# Altium PCB Main.PcbDoc (part 4 of 4)
Units mm, origin at the board's own origin, x right, y up, seen from the top; angles counter-clockwise.
Board outline 282.3 x 31.89 mm, 2 copper layers (Top Layer, Bottom Layer); 208 components, 197 nets, 886 pads, 366 vias.
Unrouted connection lines stored in the file: 118.
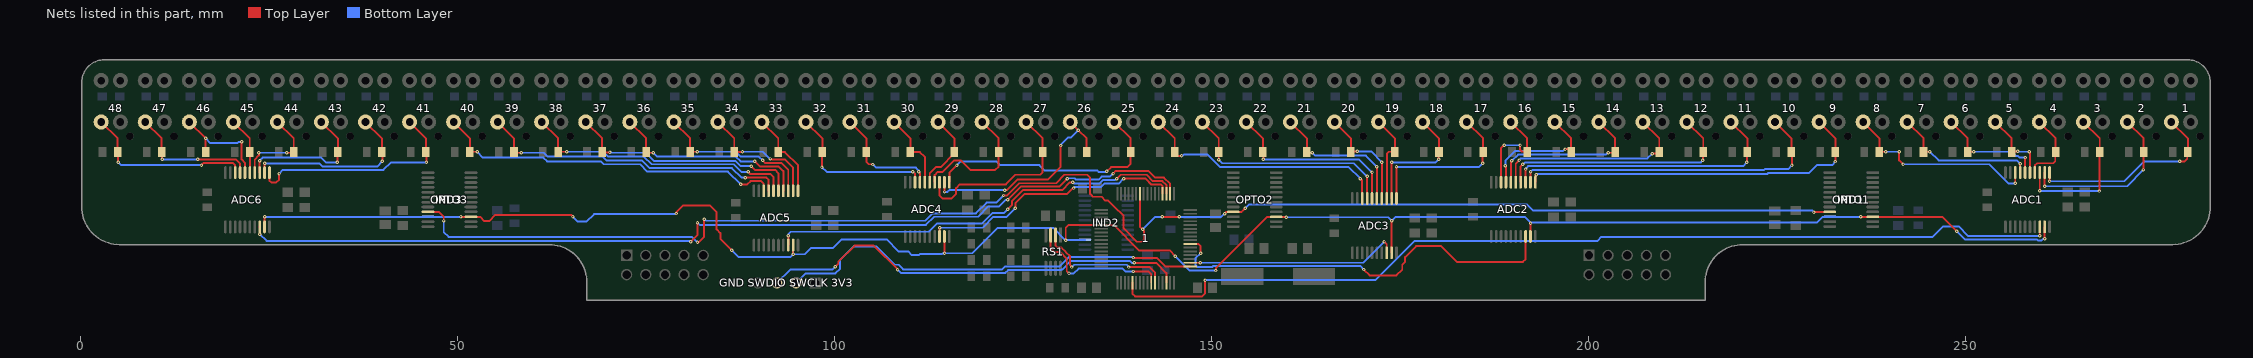
[diagram p4: the nets of this part, all layers, seen from the top]

## Via types
v1: diameter 0.45, hole 0.2, Top Layer to Bottom Layer, 362 vias
v2: diameter 5.5, hole 3.2, Top Layer to Bottom Layer, 4 vias

## Nets (pads, with @x,y where several pads share a name; then routed paths per layer and width w, separated by ;. In a path a pad name is that pad's centre, name@x,y a point inside that pad or via, vN(x,y) a via of type N, cw(c..) or ccw(c..) an arc to the next point about the centre after c; other vN are vias at no path point) (continued)
O\E\_\O\P\T\O\: 1.10 OPTO1.21 OPTO2.21 OPTO3.21 | length 208.5
  Top Layer w0.254: OPTO3.21@46.045,21.997 47.472,21.997 48.133,21.336 v1(48.133,20.795) ; v1(81.788,17.951) 81.959,17.951 82.677,18.669 v1(82.677,21.038) ; v1@122.278,24.174 v1(122.378,24.174) 122.846,24.174 124.472,25.8 129.342,25.8 130.466,26.924 133.477,26.924 133.858,26.543 133.858,24.384 134.123,24.119 ; 134.123,24.119 134.239,24.003 135.382,24.003 135.89,23.495 136.266,23.495 136.993,22.768 136.993,22.766 138.303,21.456 138.303,19.812 140.081,18.034 140.716,18.034 141.024,18.342 141.024,19.451 140.843,19.632 v1(140.843,19.685) 140.471,20.057 1.10@140.471,24.41 ; v1(143.451,21.336) v1(145.669,21.336) ; v1(151.732,21.75) 151.732,21.811 151.908,21.987 152.842,21.987 OPTO2.21@152.852,21.997 153.943,21.997 154.117,22.171 154.124,22.171 v1(154.432,22.479) ; v1(229.87,21.971) 229.896,21.997 OPTO1.21@231.973,21.997
  Bottom Layer w0.254: v1(48.133,20.795) 48.133,19.304 48.768,18.669 81.045,18.669 81.763,17.951 v1(81.788,17.951) ; v1(82.677,21.038) 82.714,21.038 82.924,20.828 112,20.828 112.981,21.809 118.71,21.809 120.142,23.241 121.445,23.241 v1(122.378,24.174) ; v1(140.843,19.685) 142.494,21.336 v1(143.451,21.336) ; v1(145.669,21.336) 151.257,21.336 151.671,21.75 v1(151.732,21.75) ; v1(154.432,22.479) 154.94,22.987 191.791,22.987 192.585,22.193 229.623,22.193 229.845,21.971 v1(229.87,21.971)
PanelLink_RX: 1.43 RS1.2 | length 18.4
  Top Layer w0.254: RS1.2@129.286,18.923 129.286,17.526 129.54,17.272 130.048,17.272 130.639,16.681 130.639,16.662 131.217,16.084 131.217,14.935 131.445,14.707 v1(131.445,14.688) ; v1(139,14.688) 141.776,14.688 142.471,13.993 1.43@142.471,12.607
  Bottom Layer w0.254: v1(131.445,14.688) 131.743,14.986 138.702,14.986 v1(139,14.688)
PanelLink_TX: 1.42 RS1.3 | length 19.1
  Top Layer w0.254: RS1.3@128.636,18.923 128.636,17.16 129.115,16.681 129.877,16.681 130.763,15.795 130.763,14.144 v1(131.064,13.843) ; v1(139.573,14.097) 141.605,14.097 141.971,13.731 1.42@141.971,12.607
  Bottom Layer w0.254: v1(131.064,13.843) 131.699,13.843 132.334,14.478 138.176,14.478 138.557,14.097 v1(139.573,14.097)
S\S\_\A\D\C\1\: 1.37 ADC1.18 | length 128.4
  Top Layer w0.254: 1.37@139.471,12.607 139.471,11.151 139.827,10.795 148.717,10.795 149.025,11.103 ; 149.098,11.176 149.098,12.935 v1(149.107,12.945) ; v1(259.816,18.822) ADC1.18@259.816,20.022
  Bottom Layer w0.254: v1(149.107,12.945) 149.117,12.954 171.704,12.954 176.911,18.161 201.168,18.161 201.676,18.669 221.615,18.669 245.618,18.669 247.015,20.066 249.047,20.066 250.291,18.822 v1(259.816,18.822)
S\S\_\A\D\C\2\: 1.55 ADC2.18 | length 55.1
  Top Layer w0.254: 1.55@147.126,17.756 148.233,17.756 148.517,17.472 v1(148.517,16.51) ; v1(170.18,14.351) 170.942,13.589 174.498,13.589 175.26,14.351 175.26,14.986 175.641,15.367 175.641,16.002 177.092,17.453 180.413,17.453 182.499,15.367 191.262,15.367 191.617,15.722 ADC2.18@191.617,18.736
  Bottom Layer w0.254: v1(148.517,16.51) 147.828,15.821 147.828,15.008 148.158,14.678 150.06,14.678 150.18,14.798 169.733,14.798 v1(170.18,14.351)
S\S\_\A\D\C\3\: 1.50 ADC3.18 | length 28.5
  Top Layer w0.254: 1.50@147.126,15.256 147.962,15.256 147.966,15.252 v1(148.451,15.252) ; v1(172.847,18.034) 173.202,17.679 ADC3.18@173.202,16.577
  Bottom Layer w0.254: v1(148.451,15.252) 170.065,15.252 v1(172.847,18.034)
S\S\_\A\D\C\4\: 1.4 ADC4.18 | length 35.2
  Top Layer w0.254: ADC4.18@113.893,18.736 113.906,18.749 113.906,19.882 v1(113.919,19.895) ; v1(123.952,22.479) 123.952,23.114 125.222,24.384 130.81,24.384 131.514,25.088 131.63,25.088 v1(131.707,25.164) ; v1(138.303,26.372) 138.356,26.372 138.4,26.416 141.217,26.416 142.006,25.626 143.269,25.626 143.471,25.425 1.4@143.471,24.41
  Bottom Layer w0.254: v1(113.919,19.895) 119.59,19.895 119.688,19.993 119.695,19.993 121.038,21.336 122.809,21.336 v1(123.952,22.479) ; v1(131.707,25.164) 131.707,25.178 131.856,25.327 135.323,25.327 135.758,25.762 137.649,25.762 138.259,26.372 v1(138.303,26.372)
S\S\_\A\D\C\5\: 1.3 ADC5.18 | length 57
  Top Layer w0.254: ADC5.18@93.827,17.593 93.84,17.606 93.84,18.827 v1(93.853,18.84) ; v1(122.936,22.352) 123.488,22.904 123.488,23.419 124.907,24.838 124.914,24.838 124.968,24.892 130.175,24.892 131.191,25.908 v1(131.572,25.908) ; v1(137.414,26.416) 137.922,26.924 141.351,26.924 142.195,26.08 143.457,26.08 143.971,25.567 1.3@143.971,24.41
  Bottom Layer w0.254: v1(93.853,18.84) 93.855,18.842 93.855,19.052 94.167,19.364 112.462,19.364 113.545,20.447 119.507,20.447 120.885,21.825 122.409,21.825 v1(122.936,22.352) ; v1(131.572,25.908) 131.625,25.908 131.752,25.781 135.135,25.781 135.57,26.216 137.161,26.216 137.361,26.416 v1(137.414,26.416)
S\S\_\A\D\C\6\: 1.2 ADC6.18 | length 129.4
  Top Layer w0.254: ADC6.18@23.723,20.006 23.749,19.98 v1(23.749,19.05) ; v1(80.899,18.034) 81.788,18.923 v1(81.788,20.574) ; v1(122.936,23.622) 124.66,25.346 129.74,25.346 130.668,26.274 130.7,26.274 130.798,26.372 v1(130.851,26.372) ; v1(136.906,27.051) 137.287,27.432 141.605,27.432 142.494,26.543 143.637,26.543 144.471,25.709 1.2@144.471,24.41
  Bottom Layer w0.254: v1(23.749,19.05) 24.638,18.161 80.719,18.161 80.846,18.034 v1(80.899,18.034) ; v1(81.788,20.574) 82.09,20.272 112.086,20.272 113.169,21.355 119.004,21.355 120.382,22.733 121.793,22.733 122.644,23.584 122.898,23.584 v1(122.936,23.622) ; v1(130.851,26.372) 130.939,26.46 131.801,26.46 131.972,26.289 135.001,26.289 135.382,26.67 136.472,26.67 136.853,27.051 v1(136.906,27.051)
SCK: 1.21 ADC1.19 ADC2.19 ADC3.19 ADC4.19 ADC5.19 ADC6.19 IND1.3 IND2.3 IND3.3 OPTO1.3 OPTO2.3 OPTO3.3 | length 271.4
  Top Layer w0.254: ADC6.19@24.373,20.006 24.373,21.325 v1(24.384,21.336) ; v1(50.419,21.336) 51.734,21.336 OPTO3.3@51.745,21.347 52.948,21.347 53.521,20.774 54.175,20.774 54.991,21.59 65.024,21.59 v1(65.278,21.336) ; v1(78.994,21.781) 78.994,21.927 79.927,22.86 83.439,22.86 84.328,21.971 84.328,19.685 84.836,19.177 84.836,18.415 v1(86.36,16.891) ; ADC5.19@94.477,17.593 94.483,17.587 94.483,16.388 v1(94.488,16.383) ; ADC4.19@114.543,18.736 114.546,18.733 114.546,16.518 v1(114.554,16.51) ; v1(130.613,18.241) 130.613,18.262 130.639,18.288 130.639,19.895 131.024,20.28 132.783,20.28 132.801,20.262 1.21@135.323,20.262 136.971,20.262 140.342,16.891 144.399,16.891 v1(145.161,16.129) ; v1(150.504,14.224) 150.542,14.262 150.542,14.518 157.366,21.342 158.547,21.342 OPTO2.3@158.552,21.347 158.563,21.336 159.796,21.336 159.84,21.292 v1(159.893,21.292) ; ADC3.19@173.852,16.577 173.852,20.817 v1(173.863,20.828) ; ADC2.19@192.267,18.736 192.272,18.741 192.272,20.48 192.278,20.486 v1(192.278,20.491) ; v1(236.093,21.336) 237.662,21.336 OPTO1.3@237.673,21.347 246.877,21.347 v1(248.793,19.431) ; ADC1.19@260.466,20.022 260.466,18.426 v1(260.477,18.415)
  Bottom Layer w0.254: v1(24.384,21.336) 46.034,21.336 IND3.3@46.045,21.347 50.408,21.347 v1(50.419,21.336) ; v1(65.278,21.336) 65.913,20.701 67.056,20.701 68.072,21.717 78.747,21.717 78.786,21.756 78.969,21.756 v1(78.994,21.781) ; v1(86.36,16.891) 87.249,16.002 94.107,16.002 v1(94.488,16.383) 96.012,16.383 96.828,17.199 99.756,17.199 100.899,18.342 106.873,18.342 108.451,16.764 109.728,16.764 110.236,16.256 111.125,16.256 111.306,16.437 114.234,16.437 114.27,16.472 114.516,16.472 v1(114.554,16.51) 118.258,16.51 121.614,19.866 128.964,19.866 130.589,18.241 v1(130.613,18.241) ; v1@130.799,18.268 133.136,18.268 IND2.3@133.167,18.299 ; v1(145.161,16.129) 147.066,14.224 v1(150.504,14.224) ; v1(159.893,21.292) 173.399,21.292 v1(173.863,20.828) 174.371,21.336 191.516,21.336 v1@192.278,20.574 ; v1(192.278,20.491) v1@192.278,20.574 ; v1(236.093,21.336) 231.984,21.336 IND1.3@231.973,21.347 231.967,21.341 231.025,21.341 230.312,20.628 230.305,20.628 230.251,20.574 v1@192.278,20.574 ; v1(248.793,19.431) 249.91,18.314 259.467,18.314 259.565,18.216 260.067,18.216 260.229,18.377 260.439,18.377 v1(260.477,18.415)
SENS1: 1.C ADC1.1 R2_LightSensor1.1 | length 26.5
  Top Layer w0.254: v1@261.116,26.062 ADC1.1@261.116,27.222 ; 1.C@277.281,33.92 279.451,31.75 R2_LightSensor1.1@279.451,29.939 279.374,29.862 279.374,29.057 279.019,28.702 v1(278.384,28.702)
  Bottom Layer w0.254: v1(261.112,26.062) 271.045,26.062 273.685,28.702 v1(278.384,28.702)
SENS2: 2.C ADC1.2 R2_LightSensor2.1 | length 23.1
  Top Layer w0.254: ADC1.2@260.466,27.222 260.466,25.411 v1(260.477,25.4) ; 2.C@271.439,33.92 273.609,31.75 273.558,31.699 v1(273.558,27.559)
  Bottom Layer w0.254: v1(260.477,25.4) 271.399,25.4 v1(273.558,27.559)
SENS3: 3.C ADC1.3 R2_LightSensor3.1 | length 20.4
  Top Layer w0.254: v1(259.816,24.812) ADC1.3@259.816,27.222 ; 3.C@265.597,33.92 267.767,31.75 R2_LightSensor3.1@267.767,29.939 267.716,29.888 v1(267.716,24.765)
  Bottom Layer w0.254: v1(259.816,24.812) 259.837,24.791 267.69,24.791 v1(267.716,24.765)
SENS4: 4.C ADC1.4 R2_LightSensor4.1 | length 10
  Top Layer w0.254: ADC1.4@259.166,27.222 259.177,27.233 259.177,28.164 259.461,28.448 259.581,28.448 259.586,28.453 261.625,28.453 261.874,28.702 261.874,29.888 R2_LightSensor4.1@261.925,29.939 261.925,31.75 4.C@259.755,33.92
SENS5: 5.C ADC1.5 R2_LightSensor5.1 | length 10.1
  Top Layer w0.254: 5.C@253.913,33.92 256.083,31.75 R2_LightSensor5.1@256.083,29.939 256.164,30.02 v1(256.873,30.02) ; v1(258.445,29.972) 258.516,29.901 ADC1.5@258.516,27.222
  Bottom Layer w0.254: v1(256.873,30.02) 256.921,29.972 v1(258.445,29.972)
SENS6: 6.C ADC1.6 R2_LightSensor6.1 | length 14.9
  Top Layer w0.254: 6.C@248.071,33.92 250.241,31.75 R2_LightSensor6.1@250.241,29.939 250.274,29.972 v1(251.064,29.972) ; ADC1.6@257.866,27.222 257.866,29.012 257.91,29.056 v1(257.91,29.21)
  Bottom Layer w0.254: v1(251.064,29.972) 256.064,29.972 256.622,29.414 256.928,29.414 257.131,29.21 v1(257.91,29.21)
SENS7: 7.C ADC1.7 R2_LightSensor7.1 | length 19.5
  Top Layer w0.254: 7.C@242.229,33.92 244.399,31.75 R2_LightSensor7.1@244.399,29.939 244.432,29.972 v1(245.222,29.972) ; ADC1.7@257.216,27.222 v1(257.216,28.407)
  Bottom Layer w0.254: v1(245.222,29.972) 245.249,29.972 246.392,28.829 256.794,28.829 v1(257.216,28.407)
SENS8: 8.C ADC1.8 R2_LightSensor8.1 | length 26.7
  Top Layer w0.254: 8.C@236.387,33.92 238.557,31.75 R2_LightSensor8.1@238.557,29.939 238.59,29.972 v1(239.395,29.972) ; v1(241.173,29.972) 241.173,28.829 v1(241.681,28.321) ; v1(256.54,25.781) 256.566,25.807 ADC1.8@256.566,27.222
  Bottom Layer w0.254: v1(239.395,29.972) v1(241.173,29.972) ; v1(241.681,28.321) 253.111,28.321 255.651,25.781 v1(256.54,25.781)
SENS9: 9.C ADC2.1 R2_LightSensor9.1 | length 47.7
  Top Layer w0.254: ADC2.1@192.917,25.936 192.935,25.954 192.935,26.819 v1(193.04,26.924) ; 9.C@230.545,33.92 232.715,31.75 R2_LightSensor9.1@232.715,29.939 v1(232.715,28.679) v1@232.664,28.628
  Bottom Layer w0.254: v1(193.04,26.924) 193.093,26.924 193.22,27.051 223.679,27.051 223.777,27.149 229.206,27.149 230.251,28.194 232.283,28.194 232.715,28.626 v1(232.715,28.679)
SENS10: 10.C ADC2.2 R2_LightSensor10.1 | length 43.1
  Top Layer w0.254: v1(192.278,27.305) 192.267,27.294 ADC2.2@192.267,25.936 ADC2.2@192.285,25.954 ; 10.C@224.703,33.92 226.873,31.75 R2_LightSensor10.1@226.873,29.939 226.949,29.863 v1(226.949,28.194)
  Bottom Layer w0.254: v1(192.278,27.305) 192.331,27.305 192.585,27.559 223.266,27.559 223.393,27.686 226.441,27.686 v1(226.949,28.194)
SENS11: 11.C ADC2.3 R2_LightSensor11.1 | length 37.8
  Top Layer w0.254: ADC2.3@191.617,25.936 191.617,27.7 191.631,27.686 v1(191.643,27.686) ; 11.C@218.861,33.92 221.031,31.75 R2_LightSensor11.1@221.031,29.939 220.98,29.888 v1(220.98,28.575)
  Bottom Layer w0.254: v1(191.643,27.686) 191.643,27.725 191.624,27.744 191.947,28.067 220.472,28.067 v1(220.98,28.575)
SENS12: 12.C ADC2.4 R2_LightSensor12.1 | length 32.6
  Top Layer w0.254: ADC2.4@190.967,25.936 190.967,28.026 v1(191.262,28.321) ; 12.C@213.019,33.92 215.189,31.75 R2_LightSensor12.1@215.189,29.939 215.138,29.888 v1(215.138,28.829)
  Bottom Layer w0.254: v1(191.262,28.321) 191.315,28.321 191.569,28.575 214.884,28.575 v1(215.138,28.829)
SENS13: 13.C ADC2.5 R2_LightSensor13.1 | length 27
  Top Layer w0.254: ADC2.5@190.317,25.936 190.317,28.392 v1(190.754,28.829) ; 13.C@207.177,33.92 209.347,31.75 R2_LightSensor13.1@209.347,29.939 209.126,29.718 v1(208.407,29.718)
  Bottom Layer w0.254: v1(190.754,28.829) 191.008,29.083 207.772,29.083 v1(208.407,29.718)
SENS14: 14.C ADC2.6 R2_LightSensor14.1 | length 22
  Top Layer w0.254: ADC2.6@189.667,25.936 189.667,28.631 v1(189.811,28.775) ; 14.C@201.335,33.92 203.505,31.75 R2_LightSensor14.1@203.505,29.939 203.411,29.845 v1(202.565,29.845)
  Bottom Layer w0.254: v1(189.811,28.775) 190.627,29.591 202.258,29.591 202.512,29.845 v1(202.565,29.845)
SENS15: 15.C ADC2.7 R2_LightSensor15.1 | length 17.3
  Top Layer w0.254: v1(188.919,28.105) 188.919,28.052 189.017,27.954 ADC2.7@189.017,25.936 ; 15.C@195.493,33.92 197.663,31.75 R2_LightSensor15.1@197.663,29.939 197.663,29.951 197.29,30.324 v1(196.85,30.324)
  Bottom Layer w0.254: v1(188.919,28.105) 188.957,28.143 188.957,28.281 188.976,28.301 188.976,28.829 190.246,30.099 196.603,30.099 196.828,30.324 v1(196.85,30.324)
SENS16: 16.C ADC2.8 R2_LightSensor16.1 | length 13.8
  Top Layer w0.254: ADC2.8@188.367,25.936 188.367,30.506 188.637,30.776 188.732,30.776 v1(188.77,30.813) ; 16.C@189.651,33.92 191.821,31.75 R2_LightSensor16.1@191.821,29.939 191.742,30.018 191.089,30.018 190.881,30.226 v1(190.881,30.861)
  Bottom Layer w0.254: v1(188.77,30.813) 188.793,30.837 190.857,30.837 v1(190.881,30.861)
SENS17: 17.C ADC3.1 R2_LightSensor17.1 | length 22.2
  Top Layer w0.254: v1(174.498,27.969) 174.502,27.965 ADC3.1@174.502,23.777 ; 17.C@183.809,33.92 185.979,31.75 R2_LightSensor17.1@185.979,29.939 185.928,29.888 v1(185.928,28.448)
  Bottom Layer w0.254: v1(174.498,27.969) 185.449,27.969 v1(185.928,28.448)
SENS18: 18.C ADC3.2 R2_LightSensor18.1 | length 17.1
  Top Layer w0.254: ADC3.2@173.852,23.777 173.863,23.788 v1(173.863,28.575) ; 18.C@177.967,33.92 180.137,31.75 R2_LightSensor18.1@180.137,29.939 180.086,29.888 v1(180.086,28.956)
  Bottom Layer w0.254: v1(173.863,28.575) 179.705,28.575 v1(180.086,28.956)
SENS19: 19.C ADC3.3 R2_LightSensor19.1 | length 12
  Top Layer w0.254: 19.C@172.125,33.92 174.295,31.75 R2_LightSensor19.1@174.295,29.939 174.262,29.972 173.482,29.972 173.228,29.718 173.228,24.546 173.22,24.538 173.22,23.795 ADC3.3@173.202,23.777
SENS20: 20.C ADC3.4 R2_LightSensor20.1 | length 14.5
  Top Layer w0.254: 20.C@166.283,33.92 168.453,31.75 R2_LightSensor20.1@168.453,29.939 168.53,30.016 v1(169.291,30.016) ; ADC3.4@172.552,23.777 v1(172.552,28.608) v1@172.593,28.649
  Bottom Layer w0.254: v1(169.291,30.016) 171.144,30.016 v1(172.552,28.608)
SENS21: 21.C ADC3.5 R2_LightSensor21.1 | length 19.3
  Top Layer w0.254: 21.C@160.441,33.92 162.611,31.75 R2_LightSensor21.1@162.611,29.939 162.56,29.888 162.603,29.845 v1(163.322,29.845) ; ADC3.5@171.902,23.777 v1(171.902,28.011)
  Bottom Layer w0.254: v1(163.322,29.845) 163.703,29.464 170.449,29.464 v1(171.902,28.011)
SENS22: 22.C ADC3.6 R2_LightSensor22.1 | length 24.5
  Top Layer w0.254: 22.C@154.599,33.92 156.769,31.75 R2_LightSensor22.1@156.769,29.939 156.845,29.863 v1(156.845,29) ; v1@171.196,27.305 v1(171.252,27.249) ADC3.6@171.252,23.777
  Bottom Layer w0.254: v1(156.845,29) 156.883,28.962 157.021,28.962 157.028,28.956 169.492,28.956 171.199,27.249 v1(171.252,27.249)
SENS23: 23.C ADC3.7 R2_LightSensor23.1 | length 29.5
  Top Layer w0.254: 23.C@148.757,33.92 150.927,31.75 R2_LightSensor23.1@150.927,29.939 v1(150.927,28.905) ; v1@170.561,26.744 v1(170.602,26.703) ADC3.7@170.602,23.777
  Bottom Layer w0.254: v1(150.927,28.905) 151.384,28.448 168.831,28.448 170.576,26.703 v1(170.602,26.703)
SENS24: 24.C ADC3.8 R2_LightSensor24.1 | length 33.9
  Top Layer w0.254: 24.C@142.915,33.92 145.085,31.75 145.085,29.797 145.458,29.424 145.983,29.424 v1(145.987,29.42) ; v1(169.672,26.416) 169.926,26.162 169.926,24.546 169.934,24.538 169.934,23.795 ADC3.8@169.952,23.777
  Bottom Layer w0.254: v1(145.987,29.42) 146.024,29.458 146.157,29.458 146.324,29.625 149.413,29.625 151.098,27.94 168.167,27.94 169.672,26.435 v1(169.672,26.416)
SENS25: 25.C ADC4.1 R2_LightSensor25.1 | length 33.4
  Top Layer w0.254: ADC4.1@115.193,25.936 115.189,25.94 115.189,27.178 v1(116.205,28.194) ; v1(136.09,27.378) 136.652,27.94 138.811,27.94 139.243,28.372 R2_LightSensor25.1@139.243,29.939 139.243,31.75 25.C@137.073,33.92
  Bottom Layer w0.254: v1(116.205,28.194) 116.713,28.702 121.426,28.702 121.934,28.194 127.127,28.194 127.835,27.486 134.82,27.486 135.001,27.305 136.017,27.305 v1(136.09,27.378)
SENS26: 26.C ADC4.2 R2_LightSensor26.1 | length 29.1
  Top Layer w0.254: ADC4.2@114.543,25.936 114.554,25.925 v1(114.554,24.638) ; v1(122.526,24.892) 122.809,24.892 124.206,26.289 128.277,26.289 128.855,26.867 128.855,26.874 129.921,27.94 129.921,30.724 129.964,30.767 v1(129.964,30.797) ; 26.C@131.231,33.92 v1(132.316,32.835) 133.401,31.75 R2_LightSensor26.1@133.401,29.939
  Bottom Layer w0.254: v1(114.554,24.638) 114.935,24.638 115.189,24.892 v1(122.526,24.892) ; v1(129.964,30.797) 129.964,30.904 130.937,31.877 131.358,31.877 v1(132.316,32.835)
SENS27: 27.C ADC4.3 R2_LightSensor27.1 | length 25.1
  Top Layer w0.254: ADC4.3@113.893,25.936 113.893,24.156 114.3,23.749 115.443,23.749 116.078,24.384 116.078,25.146 116.586,25.654 122.682,25.654 123.952,26.924 127.254,26.924 127.559,27.229 R2_LightSensor27.1@127.559,29.939 127.559,31.75 27.C@125.389,33.92
SENS28: 28.C ADC4.4 R2_LightSensor28.1 | length 17.8
  Top Layer w0.254: ADC4.4@113.243,25.936 113.246,25.939 113.246,26.886 113.665,27.305 114.3,27.305 115.824,28.829 116.713,28.829 117.983,27.559 121.285,27.559 121.717,27.991 R2_LightSensor28.1@121.717,29.939 121.717,31.75 28.C@119.547,33.92
SENS29: 29.C ADC4.5 R2_LightSensor29.1 | length 10.6
  Top Layer w0.254: ADC4.5@112.593,25.936 112.6,25.943 112.6,27.129 113.411,27.94 114.026,27.94 115.875,29.789 115.875,31.75 29.C@113.705,33.92
SENS30: 30.C ADC4.6 R2_LightSensor30.1 | length 10.4
  Top Layer w0.254: 30.C@107.863,33.92 110.033,31.75 R2_LightSensor30.1@110.033,29.939 111.285,29.939 111.943,29.281 ADC4.6@111.943,25.936
SENS31: 31.C ADC4.7 R2_LightSensor31.1 | length 15.2
  Top Layer w0.254: 31.C@102.021,33.92 104.191,31.75 R2_LightSensor31.1@104.191,29.939 104.191,28.651 104.521,28.321 104.846,28.321 104.853,28.315 104.991,28.315 v1(105.029,28.277) ; v1(111.163,27.343) 111.163,27.29 111.293,27.16 ADC4.7@111.293,25.936
  Bottom Layer w0.254: v1(105.029,28.277) 105.073,28.277 105.473,27.877 110.767,27.877 111.163,27.481 v1(111.163,27.343)
SENS32: 32.C ADC4.8 R2_LightSensor32.1 | length 20.7
  Top Layer w0.254: 32.C@96.179,33.92 98.349,31.75 R2_LightSensor32.1@98.349,29.939 98.298,29.888 v1(98.298,27.94) ; v1(110.363,27.305) 110.643,27.025 ADC4.8@110.643,25.936
  Bottom Layer w0.254: v1(98.298,27.94) 98.933,27.305 v1(110.363,27.305)
SENS33: 33.C ADC5.1 R2_LightSensor33.1 | length 11.6
  Top Layer w0.254: 33.C@90.337,33.92 92.507,31.75 R2_LightSensor33.1@92.507,29.939 93.378,29.939 95.127,28.19 ADC5.1@95.127,24.793
SENS34: 34.C ADC5.2 R2_LightSensor34.1 | length 16.6
  Top Layer w0.254: 34.C@84.495,33.92 86.665,31.75 R2_LightSensor34.1@86.665,29.939 87.724,29.939 v1(87.757,29.972) ; v1(91.44,29.019) 91.478,28.981 91.616,28.981 91.642,28.956 93.345,28.956 94.477,27.824 ADC5.2@94.477,24.793
  Bottom Layer w0.254: v1(87.757,29.972) 90.424,29.972 91.279,29.117 91.289,29.117 91.387,29.019 v1(91.44,29.019)
SENS35: 35.C ADC5.3 R2_LightSensor35.1 | length 21.7
  Top Layer w0.254: 35.C@78.653,33.92 80.823,31.75 R2_LightSensor35.1@80.823,29.939 80.856,29.972 v1(81.744,29.972) ; v1(90.424,28.829) 90.786,28.467 92.945,28.467 93.827,27.585 ADC5.3@93.827,24.793
  Bottom Layer w0.254: v1(81.744,29.972) 86.875,29.972 87.51,29.337 89.916,29.337 v1(90.424,28.829)
SENS36: 36.C ADC5.4 R2_LightSensor36.1 | length 26.7
  Top Layer w0.254: 36.C@72.811,33.92 74.981,31.75 R2_LightSensor36.1@74.981,29.939 75.075,29.845 v1(75.946,29.845) ; v1(89.408,28.702) 90.097,28.013 92.566,28.013 93.177,27.402 ADC5.4@93.177,24.793
  Bottom Layer w0.254: v1(75.946,29.845) 76.454,29.337 86.868,29.337 87.503,28.702 v1(89.408,28.702)
SENS37: 37.C ADC5.5 R2_LightSensor37.1 | length 31.8
  Top Layer w0.254: 37.C@66.969,33.92 69.139,31.75 R2_LightSensor37.1@69.139,29.939 69.189,29.889 v1(70.187,29.889) ; v1(88.9,28.067) 89.408,27.559 92.075,27.559 92.527,27.107 ADC5.5@92.527,24.793
  Bottom Layer w0.254: v1(70.187,29.889) 70.225,29.851 70.363,29.851 70.37,29.845 74.93,29.845 76,28.775 86.788,28.775 87.496,28.067 v1(88.9,28.067)
SENS38: 38.C ADC5.6 R2_LightSensor38.1 | length 36.7
  Top Layer w0.254: 38.C@61.127,33.92 63.297,31.75 R2_LightSensor38.1@63.297,29.939 63.33,29.972 v1(64.472,29.972) ; v1(88.519,27.305) 88.773,27.051 91.44,27.051 91.877,26.614 ADC5.6@91.877,24.793
  Bottom Layer w0.254: v1(64.472,29.972) 69.323,29.972 69.958,29.337 74.676,29.337 75.692,28.321 86.6,28.321 87.616,27.305 v1(88.519,27.305)
SENS39: 39.C ADC5.7 R2_LightSensor39.1 | length 41.6
  Top Layer w0.254: 39.C@55.285,33.92 57.455,31.75 R2_LightSensor39.1@57.455,29.939 57.549,29.845 v1(58.42,29.845) ; v1(88.138,26.543) 90.932,26.543 91.227,26.248 ADC5.7@91.227,24.793
  Bottom Layer w0.254: v1(58.42,29.845) 61.408,29.845 61.916,29.337 69.215,29.337 69.723,28.829 74.422,28.829 75.438,27.813 86.36,27.813 87.63,26.543 v1(88.138,26.543)
SENS40: 40.C ADC5.8 R2_LightSensor40.1 | length 46.9
  Top Layer w0.254: 40.C@49.443,33.92 51.613,31.75 R2_LightSensor40.1@51.613,29.939 51.646,29.972 v1(52.578,29.972) ; v1(87.503,25.654) 88.392,25.654 88.827,26.089 90.243,26.089 90.577,25.755 ADC5.8@90.577,24.793
  Bottom Layer w0.254: v1(52.578,29.972) 53.34,29.21 61.341,29.21 61.849,28.702 68.961,28.702 69.342,28.321 74.168,28.321 75.15,27.339 85.818,27.339 v1(87.503,25.654)
SENS41: 41.C ADC6.1 R2_LightSensor41.1 | length 29.8
  Top Layer w0.254: ADC6.1@25.023,27.206 25.023,26.158 25.273,25.908 25.908,25.908 26.289,26.289 v1(26.289,27.051) ; 41.C@43.601,33.92 45.771,31.75 R2_LightSensor41.1@45.771,29.939 45.847,29.863 v1(45.847,28.575)
  Bottom Layer w0.254: v1(26.289,27.051) 26.797,27.559 40.132,27.559 41.148,28.575 v1(45.847,28.575)
SENS42: 42.C ADC6.2 R2_LightSensor42.1 | length 23.5
  Top Layer w0.254: ADC6.2@24.373,27.206 v1(24.373,28.437) ; 42.C@37.759,33.92 39.929,31.75 R2_LightSensor42.1@39.929,29.939 40.005,29.863 v1(40.005,28.702)
  Bottom Layer w0.254: v1(24.373,28.437) 31.612,28.437 31.623,28.448 32.058,28.013 39.316,28.013 v1(40.005,28.702)
SENS43: 43.C ADC6.3 R2_LightSensor43.1 | length 18.6
  Top Layer w0.254: ADC6.3@23.723,27.206 v1(23.723,28.803) ; 43.C@31.917,33.92 34.087,31.75 R2_LightSensor43.1@34.087,29.939 34.036,29.888 v1(34.036,28.575)
  Bottom Layer w0.254: v1(23.723,28.803) 23.723,28.821 24.112,29.21 31.877,29.21 32.512,28.575 v1(34.036,28.575)
SENS44: 44.C ADC6.4 R2_LightSensor44.1 | length 12.4
  Top Layer w0.254: ADC6.4@23.073,27.206 23.073,28.934 23.622,29.483 23.622,29.826 v1(23.613,29.836) ; 44.C@26.075,33.92 28.245,31.75 R2_LightSensor44.1@28.245,29.939 28.151,29.845 v1(27.305,29.845)
  Bottom Layer w0.254: v1(23.613,29.836) 23.622,29.845 v1(27.305,29.845)
SENS45: 45.C ADC6.5 R2_LightSensor45.1 | length 7.6
  Top Layer w0.254: 45.C@20.233,33.92 22.403,31.75 R2_LightSensor45.1@22.403,29.939 22.423,29.919 ADC6.5@22.423,27.206
SENS46: 46.C ADC6.6 R2_LightSensor46.1 | length 14.2
  Top Layer w0.254: 46.C@14.391,33.92 v1(16.561,31.75) R2_LightSensor46.1@16.561,29.939 ; v1(21.336,31.286) 21.336,28.956 21.773,28.519 ADC6.6@21.773,27.206
  Bottom Layer w0.254: v1(16.561,31.75) 17.196,31.115 20.757,31.115 20.928,31.286 v1(21.336,31.286)
SENS47: 47.C ADC6.7 R2_LightSensor47.1 | length 17.7
  Top Layer w0.254: 47.C@8.549,33.92 10.719,31.75 R2_LightSensor47.1@10.719,29.939 10.795,29.863 v1(10.795,28.956) ; v1(15.494,28.956) 20.574,28.956 21.123,28.407 ADC6.7@21.123,27.206
  Bottom Layer w0.254: v1(10.795,28.956) v1(15.494,28.956)
SENS48: 48.C ADC6.8 R2_LightSensor48.1 | length 23.2
  Top Layer w0.254: 48.C@2.707,33.92 4.877,31.75 R2_LightSensor48.1@4.877,29.939 4.953,29.863 v1(4.953,28.575) ; v1(16.002,28.194) 16.31,28.502 20.139,28.502 20.473,28.168 ADC6.8@20.473,27.206
  Bottom Layer w0.254: v1(4.953,28.575) 5.334,28.194 v1(16.002,28.194)
SYS_SWCLK: 1.49 "GND SWDIO SWCLK 3V3.2" | length 57.4
  Top Layer w0.254: v1(139.573,15.945) 139.611,15.907 139.765,15.907 139.797,15.875 142.748,15.875 143.867,14.756 1.49@147.126,14.756
  Bottom Layer w0.254: 94.869,12.573 96.139,13.843 100.095,13.843 100.711,14.459 100.711,15.621 102.524,17.434 105.502,17.434 107.95,14.986 108.458,14.986 109.074,14.37 122.193,14.37 122.555,14.732 129.794,14.732 131.064,16.002 139.39,16.002 139.41,15.983 139.535,15.983 v1(139.573,15.945)
SYS_SWDIO: 1.46 "GND SWDIO SWCLK 3V3.3" | length 57.9
  Top Layer w0.254: v1(100.076,14.732) 100.457,15.113 100.457,15.36 102.623,17.526 105.156,17.526 108.322,14.36 v1(108.322,14.342) ; v1(139.733,15.24) 142.621,15.24 143.971,13.89 1.46@143.971,12.607
  Bottom Layer w0.254: 92.329,12.573 94.107,14.351 99.695,14.351 v1(100.076,14.732) ; v1(108.322,14.342) 108.747,13.916 122.628,13.916 122.99,14.278 129.982,14.278 130.055,14.351 130.175,14.351 131.318,15.494 139.132,15.494 139.386,15.24 v1(139.733,15.24)
pads on no net: 1.1 1.7 1.14 1.15 1.16 1.17 1.20 1.24 1.25 1.26 1.27 1.28 1.29 1.33 1.34 1.35 1.36 1.38 1.39 1.40 1.41 1.44 1.45 1.51 1.52 1.53 1.54 1.56 1.57 1.58 1.59 1.61 1.62 2.1 3.1 4.1 5.1 6.1 7.1 8.1 9.1 10.1 11.1 12.1 13.1 14.1 15.1 16.1 17.1 18.1 19.1 20.1 21.1 22.1 23.1 24.1 25.1 26.1 27.1 28.1 29.1 30.1 31.1 32.1 33.1 34.1 35.1 36.1 37.1 38.1 39.1 40.1 41.1 42.1 43.1 44.1 45.1 46.1 47.1 48.1 ADC1.12 ADC1.16 ADC2.12 ADC2.16 ADC3.12 ADC3.16 ADC4.12 ADC4.16 ADC5.12 ADC5.16 ADC6.12 ADC6.16
copper on no net: | length 617.2
  Top Layer w0.254: 0.127,22.66 ccw(c5.127,22.66) 5.127,17.66 62.127,17.66 cw(c62.127,12.66) 67.127,12.66 67.127,10.287 215.427,10.287 215.427,12.66 cw(c220.427,12.66) 220.427,17.66 277.427,17.66 ccw(c277.427,22.66) 282.427,22.66 282.427,39.176 ccw(c279.427,39.176) 279.427,42.176 3.127,42.176 ccw(c3.127,39.176) 0.127,39.176 0.127,22.66
  other v2: 103.886,14.324 178.689,14.324 4,24.787 278.427,24.787

## Silkscreen, mask and mechanical layers (free items; w line width, h text height)
Top Overlay:
  text "RS-422 selectors" at 117.221,11.684 h0.6